# Altium PCB LAD_PCB.PcbDoc (part 1 of 2)
Units mil, origin at the board's own origin, x right, y up, seen from the top; angles counter-clockwise.
Board outline 2160 x 3165 mil, 2 copper layers (Top Layer, Bottom Layer); 66 components, 38 nets, 236 pads, 61 vias.
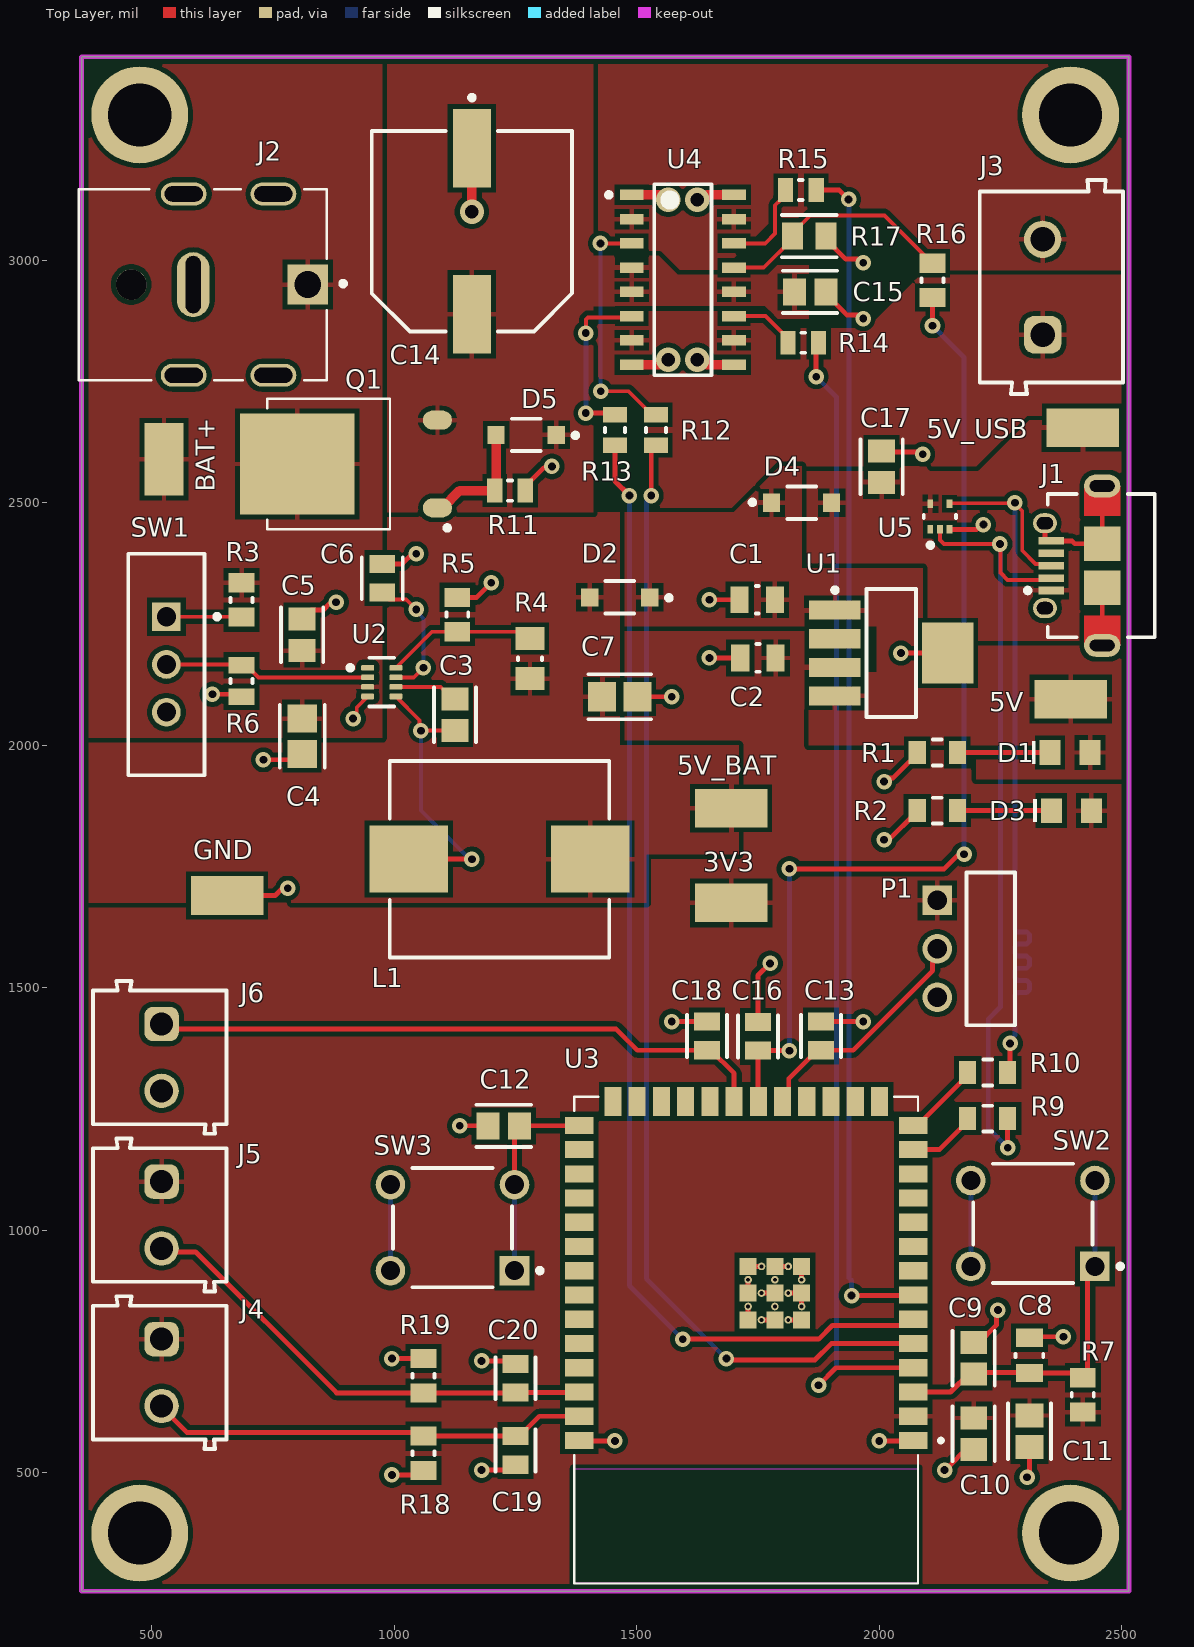
[diagram p0: Top Layer view]
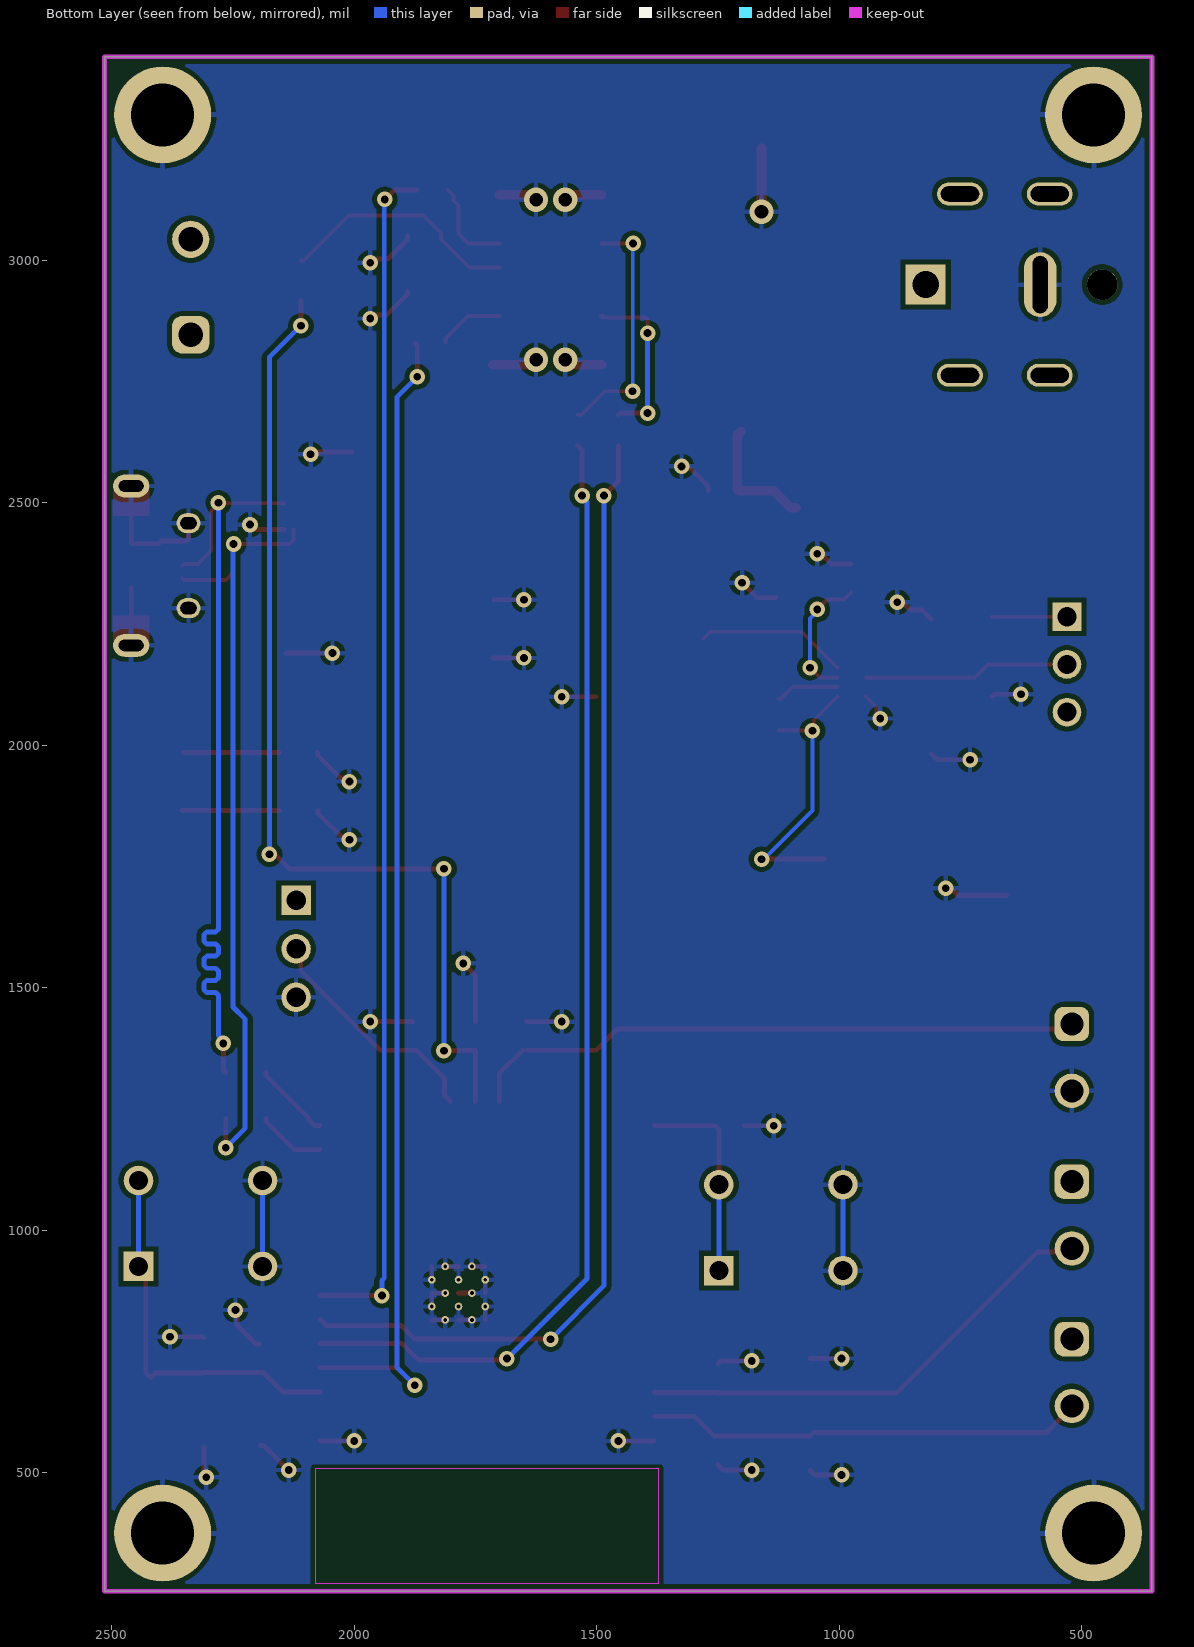
[diagram p1: Bottom Layer view, seen from below]
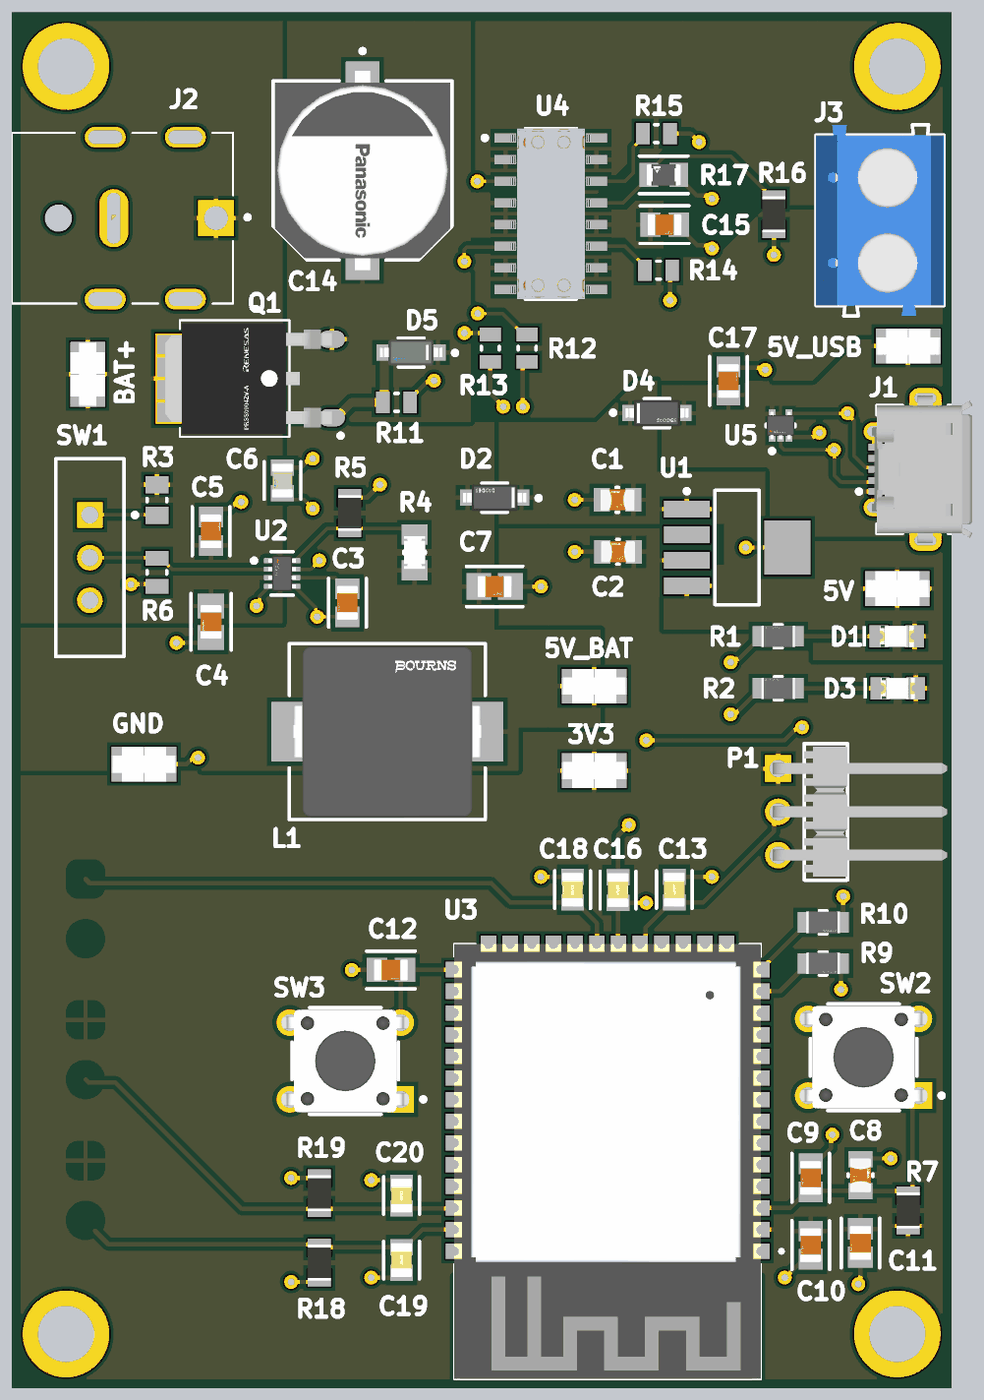
[diagram p2: 3D render of the assembled board from above, using the file's embedded part models]

## Layer stack, top to bottom
Top Solder: solder mask 0.4, Solder Resist, Dk 3.5
Top Layer: signal copper 1.4
Dielectric 1: dielectric 12.6, FR-4, Dk 4.8
Bottom Layer: signal copper 1.4
Bottom Solder: solder mask 0.4, Solder Resist, Dk 3.5

## Board outline
355,255 355,3420 2515,3420 2515,255

## Design rules (kind name [scope] priority, off if disabled: settings)
Clearance [All] p1: gap=10 ignorepadtopadclearanceinfootprint=FALSE
HoleSize [All] p1: absolutevalues=TRUE maxlimit=200 minlimit=1 maxpercent=80.000 minpercent=20.000
PolygonConnect [All] p1: connectstyle=Relief reliefconductorwidth=10 reliefentries=4 polygonreliefangle="90 Angle" airgapwidth=10
RoutingVias [All] p1: holewidth=12 width=24 viastyle="Through Hole" minholewidth=12 minwidth=24 maxholewidth=28 maxwidth=50
SolderMaskExpansion [All] p1: expansion=4 istentingtop=FALSE
Width [All] p1: maxlimit=20 minlimit=8 preferedwidth=10 minimp=50.000000 maximp=50.000000 favimp=50.000000
29 further rules are at their usual default settings.

## Classes and differential pairs
component class Power: 3V3 5V 5V_BAT 5V_USB BAT+ C1 C2 C3 C4 C5 C6 C7 D1 D2 D3 D4 GND L1 R1 R2 R3 R4 R5 R6 SW1 U1 U2
component class Motor: C14 C15 C16 D5 Q1 R11 R12 R13 R14 R15 R16 R17 U4
component class MCU: C8 C9 C10 C11 C12 C13 R7 R9 R10 SW2 SW3 U3
component class Connectors: C17 C18 C19 C20 J1 J2 J3 J4 J5 J6 P1 R18 R19 U5

## Components (designator, comment, footprint, x,y, rotation, side; value= is the part's Value field where it differs from the comment)
3V3 "" KSTN-5019_V 1695,1675 r0 top
5V "" KSTN-5019_V 2395,2095 r0 top
5V_BAT "" KSTN-5019_V 1695,1870 r0 top
5V_USB "" KSTN-5019_V 2420,2655 r180 top
BAT+ "" KSTN-5019_V 525,2590 r90 top
C1 "CC0805MKX7R7BB105" FP-CC0805-0_85-MFG 1748.58,2300 r180 top value="1 uF"
C2 "CC0805MKX7R7BB105" FP-CC0805-0_85-MFG 1750,2180 r180 top value="1 uF"
C3 "GCD21BR71H104MA01L" FP-GCD21B-0_15-IPC_B 1125,2062.47 r270 top
C4 "GRM21BR61H106KE43L" FP-GRM21B-0_2-e0_2_0_7-IPC_A 810,2018.55 r270 top
C5 "GCD21BR71H104MA01L" FP-GCD21B-0_15-IPC_B 810,2227.47 r90 top
C6 "C0805C333K5RACAUTO" FP-C0805C-DN-MFG 975,2344.53 r90 top value="33,000 pF"
C7 "GRM21BR61A476ME15L" FP-GRM21B-0_2-e0_2_0_7-IPC_A 1465,2100 r0 top
C8 "CC0805MKX7R7BB105" FP-CC0805-0_85-MFG 2310,741.42 r90 top value="1 uF"
C9 "GCD21BR71H104MA01L" FP-GCD21B-0_15-IPC_B 2195,735.47 r270 top
C10 "GCD21BR71H104MA01L" FP-GCD21B-0_15-IPC_B 2195,580 r270 top
C11 "GRT21BC71E106KE13L" FP-GRT21B-0_2-IPC_B 2310,585 r270 top
C12 "GCD21BR71H104MA01L" FP-GCD21B-0_15-IPC_B 1225.47,1215 r0 top
C13 "C0805C103K8RACAUTO" FP-C0805C103K8RACAUTO-MFG 1880,1400.47 r90 top
C14 "EEHZT1V271P" FP-EEH-G-MFG 1160,3060 r270 top
C15 "GCD21BR71H104MA01L" FP-GCD21B-0_15-IPC_B 1857.47,2935 r0 top
C16 "C0805C103K8RACAUTO" FP-C0805C103K8RACAUTO-MFG 1750,1399.53 r90 top
C17 "GCD21BR71H104MA01L" FP-GCD21B-0_15-IPC_B 2005,2574.53 r90 top
C18 "C0805C103K8RACAUTO" FP-C0805C103K8RACAUTO-MFG 1645,1400.47 r90 top
C19 "C0805C103K8RACAUTO" FP-C0805C103K8RACAUTO-MFG 1250,545.47 r270 top
C20 "C0805C103K8RACAUTO" FP-C0805C103K8RACAUTO-MFG 1250,694.53 r90 top
D1 "150080SS75000" WL-SMCW_0805_150080xx75000 2393.66,1985 r0 top
D2 "B0530W-7-F" FP-SOD123-MFG 1465,2305 r180 top value=170pF
D3 "150080VS75000" WL-SMCW_0805_150080xx75000 2396.34,1865 r0 top
D4 "B0530W-7-F" FP-SOD123-MFG 1840,2500 r0 top value=170pF
D5 "MMSZ5245B-7-F" FP-SOD123-MFG 1272.01,2640 r180 top
GND "" KSTN-5019_V 655,1690 r0 top
J1 "47589-0001" MOLX-47589-0001_V 2400.94,2370.28 r90 top
J2 "JACK-C-PC-10A-RA(R)" GLOBTECK_JACK-C-PC-10A-RA(R) 605,2950 r0 top
J3 "691102710002" 691102710002 2355,2945 r90 top
J4 "691103110002" 691103110002 50516.06,-49293.9 r270 top
J5 "691103110002" 691103110002 50516.06,-48968.9 r270 top
J6 "691103110002" 691103110002 50516.06,-48643.9 r270 top
L1 "SRP1038A-100M" FP-SRP1038A-100M-MFG 1217.01,1765 r0 top
P1 "TSW-103-08-F-S-RA" SMTC-TSW-103-08-X-S-RA 2120,1680 r270 top
Q1 "NP50P04SDG-E1-AY" DPAK230P1010X240-3_PRSS0004ZV-A_N 900,2580 r180 top
R1 "AC0805FR-07330RL" FP-AC0805-MFG 2120,1985 r180 top value=330Ω
R2 "AC0805FR-07330RL" FP-AC0805-MFG 2120,1865 r180 top value=330Ω
R3 "RC0805FR-07402KL" RESC2013X60X35NL10T20 685,2299.57 r90 top
R4 "CRCW080552K3FKEA" FP-CRCW0805-e3-IPC_A 1280,2178.63 r90 top
R5 "RC0805FR-0710KL" RESC2013X60X35NL10T20 1130,2269.49 r90 top value=10kR
R6 "SG73S2ATTD1003F" RESC2013X60X30LL20T20 685,2132.52 r90 top
R7 "RC0805FR-0710KL" RESC2013X60X35NL10T20 2420,660 r90 top value=10kR
R9 "AC0805FR-0733RL" FP-AC0805-MFG 2223.66,1230 r0 top value=33Ω
R10 "AC0805FR-0733RL" FP-AC0805-MFG 2223.66,1325 r0 top value=33Ω
R11 "AC0805JR-071KL" RESC2013X60X35LL10T20 1238.5,2525 r180 top
R12 "AC0805JR-071KL" RESC2013X60X35LL10T20 1540,2650 r90 top
R13 "AC0805JR-071KL" RESC2013X60X35LL10T20 1455,2650 r90 top
R14 "AC0805JR-071KL" RESC2013X60X35LL10T20 1843.5,2830 r180 top
R15 "AC0805JR-071KL" RESC2013X60X35LL10T20 1838.5,3145 r180 top
R16 "RC0805FR-0710KL" RESC2013X60X35NL10T20 2110,2958.66 r90 top value=10kR
R17 "CRCW0805200RFKEAHP" FP-CRCW0805-HPe3-IPC_B 1855.51,3050 r0 top
R18 "RC0805FR-0710KL" RESC2013X60X35NL10T20 1060,539.57 r270 top value=10kR
R19 "RC0805FR-0710KL" RESC2013X60X35NL10T20 1060,699.57 r90 top value=10kR
SW1 "EG1218" ESWI-EG1218_V 530,2166.57 r270 top
SW2 "TL1105AF160Q" FP-TL1105AF160Q-MFG 2317.05,1013.58 r180 top
SW3 "TL1105AF160Q" FP-TL1105AF160Q-MFG 1120,1005 r180 top
U1 "LP38693MPX-3.3/NOPB" MP05A_M 2025,2190 r0 top
U2 "TPS62932DRLR" FP-DRL0008A-MFG 974.13,2130.16 r0 top
U3 "ESP32-S3-WROOM-1" ESP32-S3-WROOM-1 1725.83,773.03 r180 top
U4 "VNH7070ASTR" FP-SO-16N-GAPGCFT00818-MFG 1595,2960 r0 top
U5 "TPD3E001DRLR" FP-DRL0005A-MFG 2125.32,2471.57 r0 top

## Footprints (in the part's own frame and the unit in brackets; to place one, negate y for a bottom-side part, rotate by r counter-clockwise, add the part's x,y. Pads: shape width x height; smd on the part's side, far side on the other; paste and mask are expansions set on the pad)
691102710002 [mm] "5,00mm - modular - blue - Horizontal entry with pressure clamp - 9,9 mm height - 02p"
  rrect50% 1.95x1.95 hole 1.3: 1(-2.5,0.45)
  round 1.95 hole 1.3: 2(2.5,0.45)
  silkscreen extent -5.6,-3.75 5.6,3.75, body extent -5.6,-3.75 5.6,3.75, height 9.96
691103110002 [mm] "3,50mm - modular - blue - Horizontal wire entry - Pressure clamp - 8,4mm height - 02p"
  rrect50% 1.8x1.8 hole 1.2: 1(-1271.75,-1269.9)
  round 1.8 hole 1.2: 2(-1268.25,-1269.9)
  silkscreen extent -1274,-1273.5 -1266,-1266.5, body extent -1274,-1273.5 -1266,-1266.5, height 8.45
DPAK230P1010X240-3_PRSS0004ZV-A_N [mm] "D-PAK, 3-Pads, Body 6.10x6.50mm (max), IPC Medium Density"
  rrect100% 1.525x1 smd: 1(-4.8,2.3) 3(-4.8,-2.3)
  rect 6x5.3 smd paste-3: 4(2.55,0)
  silkscreen extent -5.44,-3.41 4.11,3.47, body extent -4.81,-3.25 4.99,3.25, height 2.65
ESP32-S3-WROOM-1 [mm]
  rect 1.5x0.9 smd: 1(-8.75,5.26) 2(-8.75,3.99) 3(-8.75,2.72) 4(-8.75,1.45) 5(-8.75,0.18) 6(-8.75,-1.09) 7(-8.75,-2.36) 8(-8.75,-3.63) 9(-8.75,-4.9) 10(-8.75,-6.17) 11(-8.75,-7.44) 12(-8.75,-8.71) 13(-8.75,-9.98) 14(-8.75,-11.25) 27(8.75,-11.25) 28(8.75,-9.98) 29(8.75,-8.71) 30(8.75,-7.44) 31(8.75,-6.17) 32(8.75,-4.9) 33(8.75,-3.63) 34(8.75,-2.36) 35(8.75,-1.09) 36(8.75,0.18) 37(8.75,1.45) 38(8.75,2.72) 39(8.75,3.99) 40(8.75,5.26)
  rect 0.9x1.5 smd: 15(-6.985,-12.5) 16(-5.715,-12.5) 17(-4.445,-12.5) 18(-3.175,-12.5) 19(-1.905,-12.5) 20(-0.635,-12.5) 21(0.635,-12.5) 22(1.905,-12.5) 23(3.175,-12.5) 24(4.445,-12.5) 25(5.715,-12.5) 26(6.985,-12.5)
  rect 0.9x0.9 smd: 41_1(-1.5,-2.46) 41_2(-2.9,-2.46) 41_3(-0.1,-2.46) 41_4(-2.9,-3.86) 41_5(-1.5,-3.86) 41_6(-0.1,-3.86) 41_7(-2.9,-1.06) 41_8(-1.5,-1.06) 41_9(-0.1,-1.06)
  round 0.4 hole 0.2 mask+0: 41_10(-1.5,-1.76) 41_11(-2.9,-1.76) 41_12(-0.1,-1.76) 41_13(-2.9,-3.16) 41_14(-1.5,-3.16) 41_15(-0.1,-3.16) 41_16(-2.2,-1.06) 41_17(-0.8,-1.06) 41_18(-2.2,-2.46) 41_19(-0.8,-2.46) 41_20(-2.2,-3.86) 41_21(-0.8,-3.86)
  Keep-Out Layer region: 9,6.75 -9,6.75 -9,12.75 9,12.75
  Keep-Out Layer region: 9,6.75 -9,6.75 -9,12.75 9,12.75
  silkscreen extent -10.3,-12.75 9,12.75, body extent -9,-12.75 9,12.75, height 3.25
ESWI-EG1218_V [mm] "THD, 3-Leads, Body 11.6x4mm, Pitch 2.5mm"
  rect 1.5x1.5 hole 1: 1(-2.5,0)
  round 1.5 hole 1: 2(0,0) 3(2.5,0)
  silkscreen extent -5.8,-2 5.8,2.78, body extent -5.8,-2 5.8,2, height 7.4
FP-AC0805-MFG [mm]
  rect 0.9x1.2 smd paste+0 mask+0: 1(-1.05,0) 2(1.05,0)
  silkscreen extent -0.23,-0.67 0.23,0.67, body extent -1.6,-0.77 1.6,0.77, height 0.25
FP-C0805C103K8RACAUTO-MFG [mm]
  rect 0.95x1.35 smd paste+0 mask+0: 1(-0.75,0) 2(0.75,0)
  silkscreen extent -1.1,-1.05 1.1,1.05, body extent -1.4,-0.85 1.4,0.85, height 0.25
FP-C0805C-DN-MFG [mm]
  rect 0.95x1.35 smd paste+0 mask+0: 1(-0.75,0) 2(0.75,0)
  silkscreen extent -1.1,-1.07 1.1,1.07, body extent -1.4,-0.85 1.4,0.85, height 0.25
FP-CC0805-0_85-MFG [mm]
  rect 0.95x1.4 smd paste+0 mask+0: 1(-0.925,0) 2(0.925,0)
  silkscreen extent -0.08,-0.72 0.08,0.72, body extent -1.6,-1.05 1.6,1.05, height 0.25
FP-CRCW0805-e3-IPC_A [mil]
  rect 47.5x59.38 smd paste+0 mask+0: 1(-41.37,0) 2(41.37,0)
  silkscreen extent -3,-25 3,25, body extent -85,-49 85,49, height 10
FP-CRCW0805-HPe3-IPC_B [mil]
  rect 43.55x55.44 smd paste+0 mask+0: 1(-34.49,0) 2(34.49,0)
  silkscreen extent -56,-43 56,43, body extent -66,-38 66,38, height 10
FP-DRL0005A-MFG [mm]
  rect 0.3x0.45 smd paste-1000 mask-1000: 1(-0.5,-0.675) 2(0,-0.675) 3(0.5,-0.675) 4(0.5,0.675) 5(-0.5,0.675)
  silkscreen extent -0.85,-1.62 0.85,0.08, body extent -1.1,-1.05 1.1,1.05, height 0.25
FP-DRL0008A-MFG [mm]
  rrect33% 0.67x0.3 smd paste+0 mask+0: 1(-0.74,0.75) 2(-0.74,0.25) 3(-0.74,-0.25) 4(-0.74,-0.75) 5(0.74,-0.75) 6(0.74,-0.25) 7(0.74,0.25) 8(0.74,0.75)
  silkscreen extent -1.77,-1.28 0.65,1.28, body extent -1.17,-1.35 1.17,1.35, height 0.25
FP-EEH-G-MFG [mm]
  rect 4.1x2 smd paste+0 mask+0: 1(-4.35,0) 2(4.35,0)
  silkscreen extent -7.12,-5.25 5.25,5.25, body extent -6.65,-5.5 6.65,5.5, height 0.25
FP-GCD21B-0_15-IPC_B [mil]
  rect 47.47x55.44 smd paste+0 mask+0: 1(-32.53,0) 2(32.53,0)
  silkscreen extent -56,-43 56,43, body extent -66,-38 66,38, height 10
FP-GRM21B-0_2-e0_2_0_7-IPC_A [mil]
  rect 57.27x61.27 smd paste+0 mask+0: 1(-36.45,0) 2(36.45,0)
  silkscreen extent -65,-46 65,46, body extent -85,-50 85,50, height 10
FP-GRT21B-0_2-IPC_B [mil]
  rect 49.4x57.33 smd paste+0 mask+0: 1(-32.51,0) 2(32.51,0)
  silkscreen extent -57,-44 57,44, body extent -67,-39 67,39, height 10
FP-SO-16N-GAPGCFT00818-MFG [mm]
  rect 1.25x0.55 smd paste+0 mask+0: 1(-2.675,4.445) 2(-2.675,3.175) 3(-2.675,1.905) 4(-2.675,0.635) 5(-2.675,-0.635) 6(-2.675,-1.905) 7(-2.675,-3.175) 8(-2.675,-4.445) 9(2.675,-4.445) 10(2.675,-3.175) 11(2.675,-1.905) 12(2.675,-0.635) 13(2.675,0.635) 14(2.675,1.905) 15(2.675,3.175) 16(2.675,4.445)
  silkscreen extent -4,-5 1.5,5, body extent -3.4,-5.1 3.4,5.1, height 0.25
FP-SOD123-MFG [mm]
  rect 0.9x0.95 smd paste+0 mask+0: 1(-1.575,0) 2(1.575,0)
  silkscreen extent -2.7,-0.85 0.75,0.85, body extent -2.12,-0.95 2.12,0.95, height 0.25
FP-SRP1038A-100M-MFG [mm]
  rect 4.1x3.5 smd paste+0 mask+0: 1(-4.75,0) 2(4.75,0)
  silkscreen extent -5.75,-5.15 5.75,5.15, body extent -6.9,-5.25 6.9,5.25, height 0.25
FP-TL1105AF160Q-MFG [mm]
  rect 1.55x1.55 hole 1 paste-2539.97 mask+0: 1(-3.25,2.25)
  round 1.55 hole 1 paste-2539.97 mask+0: 2(3.25,2.25) 3(-3.25,-2.25) 4(3.25,-2.25)
  silkscreen extent -4.7,-3.13 3.13,3.13, body extent -4.13,-3.22 4.13,3.22, height 0.25
GLOBTECK_JACK-C-PC-10A-RA(R) [mm]
  rect 2.1x2.1 hole 1.4: 1(5.5,0)
  oval 1.7x3.4 hole 0.8 slot 3 at 90 deg: 2(-0.5,0)
  oval 2.4x1.2 hole 0.8 slot 2 at 0 deg: P1(3.7,4.75) P2(3.7,-4.75) P3(-1,4.75) P4(-1,-4.75)
  round 1.6 hole 1.6 unplated: ""(-3.75,0)
  silkscreen extent -6.5,-5 7.45,5
KSTN-5019_V [mm] "Test Point, 1-Leads, Body 3.81x2.03mm"
  rect 3.8x2.03 smd: 1(0,0)
  body extent -1.9,-1.01 1.9,1.02, height 2.29
MOLX-47589-0001_V [mm] "SMD, 5-Leads, Body 7.5x5.6mm, Pitch 0.65mm"
  rect 0.4x1.35 smd: 1(-1.3,1.175) 2(-0.65,1.175) 3(0,1.175) 4(0.65,1.175) 5(1.3,1.175)
  oval 1.05x1.25 hole 0.65 slot 0.85 at 90 deg: 6(-2.225,1.5) 7(2.225,1.5)
  oval 1.2x1.9 hole 0.6 slot 1.3 at 90 deg: 8(-4.175,-1.5) 11(4.175,-1.5)
  rect 1.8x1.9 smd: 9(-1.15,-1.5) 10(1.15,-1.5)
  Top Layer region: -2.6,-0.55 -4.175,-0.55 -4.175,-2.45 -2.6,-2.45
  Top Layer region: 2.6,-2.45 4.175,-2.45 4.175,-0.55 2.6,-0.55
  silkscreen extent -3.75,-4.25 3.75,2.52, body extent -4.32,-4.25 4.32,1.64, height 2.74
MP05A_M [mm] "SOT223, 5-Leads, Body 6.5x3.5mm, Pitch 1.5mm, Lead Span 7mm, IPC Low Density"
  rect 2.7x1 smd: 1(-2.95,2.25) 2(-2.95,0.75) 3(-2.95,-0.75) 4(-2.95,-2.25)
  rect 2.7x3.2 smd: 5(2.95,0)
  silkscreen extent -3.07,-3.35 1.3,3.42, body extent -1.86,-3.35 1.86,3.35, height 1.8
RESC2013X60X30LL20T20 [mm] "Chip Resistor, 2-Leads, Body 2.00x1.25mm, IPC High Density"
  rect 0.85x1.35 smd: 1(-0.825,0) 2(0.825,0)
  silkscreen extent -0.1,-0.58 0.1,0.58, body extent -1.1,-0.72 1.1,0.72, height 0.6
RESC2013X60X35LL10T20 [mm] "Chip Resistor, 2-Leads, Body 2.00x1.25mm, IPC High Density"
  rect 0.8x1.25 smd: 1(-0.8,0) 2(0.8,0)
  silkscreen extent -0.1,-0.53 0.1,0.53, body extent -1.05,-0.67 1.05,0.67, height 0.6
RESC2013X60X35NL10T20 [mm] "Chip Resistor, 2-Leads, Body 2.00x1.25mm, IPC Medium Density"
  rect 1x1.35 smd: 1(-0.9,0) 2(0.9,0)
  silkscreen extent -0.1,-0.58 0.1,0.58, body extent -1.05,-0.67 1.05,0.67, height 0.6
SMTC-TSW-103-08-X-S-RA [mm] ".025 SQ Post Terminal Strip Assembly, 1x3 Pins, Right Angle, 2.54mm Pitch, Male"
  rect 1.55x1.55 hole 1.02: 1(0,0)
  round 1.55 hole 1.02: 2(2.54,0) 3(5.08,0)
  silkscreen extent -1.46,1.52 6.54,4.06, body extent -1.27,-0.32 6.35,9.9, height 3.05
WL-SMCW_0805_150080xx75000 [mm] "SMD Mono-color Chip LED, body 2.0x1.25mm"
  rect 1.1x1.3 smd: 1(-1.05,0) 2(1.05,0)
  silkscreen extent -2,-0.6 -1.8,0.6, body extent -1,-0.63 1,0.62, height 0.7

## Part data
3V3 5V 5V_BAT 5V_USB BAT+ GND: library part CMP-1672-00008-1, "Test Point, 1 Position SMD, RoHS, Tape and Reel", Manufacturer="Keystone Electronics", Manufacturer Part Number=5019, Package Quantity=1000, Supplier Part Number=36-5019CT-ND, Category=Connectors, ComponentLink1Description="Manufacturer URL", ComponentLink1URL=http://www.keyelco.com/, ComponentLink2Description=Datasheet, ComponentLink2URL=http://www.keyelco.com/product-pdf.cfm?p=1357, ComponentLink3Description=https://datasheet.ciiva.com:443/pdfs/VipMasterIC/IC/KEYC/KEYC-S-A0003063693/KEYC-S-A0003063693-1.pdf?src-supplier=IHS+Markit, ComponentLink3URL=https://datasheet.ciiva.com:443/pdfs/VipMasterIC/IC/KEYC/KEYC-S-A0003063693/KEYC-S-A0003063693-1.pdf?src-supplier=IHS+Markit, ComponentLink4Description=https://datasheet.ciiva.com/16318/m60-2p61-16318395.pdf?src-supplier=Future+Electronics, ComponentLink4URL=https://datasheet.ciiva.com/16318/m60-2p61-16318395.pdf?src-supplier=Future+Electronics, ComponentLink5Description=https://datasheet.ciiva.com/14848/m60-2p61-14848438.pdf?src-supplier=Digikey, ComponentLink5URL=https://datasheet.ciiva.com/14848/m60-2p61-14848438.pdf?src-supplier=Digikey, ComponentLink6Description=https://datasheet.ciiva.com/14848/m60-2p61-14848439.pdf?src-supplier=Digikey, ComponentLink6URL=https://datasheet.ciiva.com/14848/m60-2p61-14848439.pdf?src-supplier=Digikey, ComponentLink7Description=https://datasheet.ciiva.com/14848/m60-2p61-14848437.pdf?src-supplier=Digikey, ComponentLink7URL=https://datasheet.ciiva.com/14848/m60-2p61-14848437.pdf?src-supplier=Digikey, ComponentLink8Description=https://datasheet.ciiva.com/16885/70182998-16885945.pdf?src-supplier=Allied+Electronics, ComponentLink8URL=https://datasheet.ciiva.com/16885/70182998-16885945.pdf?src-supplier=Allied+Electronics, Connector Type="Interconnection Device", Contact Plating=Silver, DatasheetVersion=03/2014, Mount="Surface Mount", Mounting Technology="Surface Mount", PackageDescription="1-Pin Surface Mount Device, Body 3.81 x 2.03 mm", PackageReference=5019, Packaging="Tape and Reel", Pins=1, Pricing="1=0.34, 25=0.2736, 100=0.2234, 250=0.20064, 500=0.19152 (USD)", Reach SVHC Compliant=Yes, RoHS=Yes, RoHS Compliant=Yes, RoHSCompliant=True, Stock=174520, Supplier=Digikey
C1 C2 C8: library part CMP-03422-001156-1, "CAP CER 1UF 16V X7R 0805", Capacitance=1uF, Manufacturer=Yageo, Package=CC0805-0.85, Temperature="-30°C to +85°C", Temperature Characteristic=X7R, Temperature Range High=+85°C, Temperature Range Low=-30°C, Tolerance=0.2, Voltage Rating="16 V", Automotive=No, Category=Cap, ComponentLink2Description=Datasheet, ComponentLink2URL=http://www.yageo.com/documents/recent/UPY-GPHC_Y5V_6.3V-to-50V_8.pdf, Device Class L1="Passive Components", Device Class L2=Capacitors, Device Class L3="Ceramic Capacitors", Digikey Description="CAP CER 1UF 16V X7R 0805", Footprint Url=http://www.yageo.com/exep/pages/download/literatures/UPY-C_GEN_24.pdf, Height=0.95mm, Ipc Land Pattern Name=CAPC200125X85, Lead Free=Yes, Manufacturer Part Number=CC0805MKX7R7BB105, Material=Ceramic, Mouser Description="Multilayer Ceramic Capacitors MLCC - SMD/SMT 1.0uF 16V X7R 20%", Octopart=https://octopart.com/cc0805mkx7r7bb105-yageo-33242308, RoHS=TRUE
C3 C5 C9 C10 C12 C15 C17: library part CMP-06035-004518-1, "Chip Multilayer Ceramic Capacitors for Automotive, 0805, 0.10uF, X7R, 15%, 20%, 50V, Grade 1", Capacitance=0.1uF
C4: library part CMP-06035-004402-1, "Chip Multilayer Ceramic Capacitors for General Purpose, 0805, 10uF, X5R, 15%, 10%, 50V", Capacitance=10uF, Dielectric=X5R, Tolerance=10%, Voltage Rating (DC)=50V, Length=2mm, Thickness=1.25mm, Width=1.25mm
C6: library part CMP-2007-01069-2, "CAP CER 0.033UF 50V X7R 0805", Capacitance=33nF, Manufacturer=KEMET, Package=C0805C-DN, Temperature="-55°C to +125°C", Temperature Characteristic=X7R, Temperature Coefficient=30ppm/°C, Temperature Range High=+125°C, Temperature Range Low=-55°C, Tolerance=0.1, Voltage Rating="50 V", Automotive=No, Category=Cap, ComponentLink2Description=Datasheet, ComponentLink2URL=https://content.kemet.com/datasheets/KEM_C1003_C0G_SMD.pdf, Device Class L1="Passive Components", Device Class L2=Capacitors, Device Class L3="Ceramic Capacitors", Digikey Description="CAP CER 0.033UF 50V X7R 0805", Height=0.88mm, Ipc Land Pattern Name=CAPC200125X78, Lead Free=Yes, Manufacturer Part Number=C0805C333K5RACAUTO, Material=Ceramic, Mouser Description="SMD Multilayer Ceramic Capacitor, AEC-Q200 C Series, 0.033 F, 10%, X7R, 50 V, 0805 [2012 Metric]", Octopart=https://octopart.com/c0805c333k5racauto-kemet-21768584, RoHS=TRUE
C7: library part CMP-2000-06341-2, "Chip Multilayer Ceramic Capacitors for General Purpose, 0805, 47uF, X5R, 15%, 20%, 10V", Capacitance=47uF, Case Code (Imperial)=0805, Case Code (Metric)=2012, Dielectric=X5R, Dielectric Material=Ceramic, Max Operating Temperature=85°C, Min Operating Temperature=-55°C, Tolerance=20%, Voltage=10V, Case/Package=0805, Depth=1.25mm, Dissipation Factor=0.035%, Height=1.25mm, Lead Free="Lead Free", Length=2mm, Mount="Surface Mount", Packaging="Tape and Reel", REACH SVHC="No SVHC", Termination=SMD/SMT, Thickness=0.057inch, Voltage Rating=10V, Voltage Rating (DC)=10V, Width=0.049inch
C11: library part CMP-06035-008164-1, "Multi-Layer Ceramic Capacitor 10uF 25V X7S ±10% 0805 Emboss T/R", Capacitance=10μF
C13 C16 C18 C19 C20: library part CMP-00212-126448506-1, "C0805C103K8RACAUTO Cap, 0.01UF, 10V, Mlcc, 0805 Rohs Compliant: Yes", Capacitance=10nF, Case/Package=0805, Dielectric=X7R, Max Operating Temperature=125°C, Min Operating Temperature=-55°C, Tolerance=10%, Voltage Rating=10V, Height=880µm, Material=Ceramic, NexarPartId=126448506, RoHS=Compliant, Voltage Rating (DC)=10V
C14: library part CMP-05428-001040-1, "Conductive Polymer Hybrid Aluminum Electrolytic Capacitors 270uF ±20% 35V RADIAL SMT 10x10.2mm", Capacitance=270uF, RoHS Compliant=Yes
D1: library part CMP-1426-00010-4, "Led, Red, 630 Nm, 1.9 V, 30 Ma, 60 Mcd Rohs Compliant: Yes", Case Code (Imperial)=0805, Case Code (Metric)=2012, Color=Red, Forward Current=100mA, Forward Voltage=1.9V, Max Junction Temperature (Tj)=95°C, Max Operating Temperature=85°C, Max Reverse Voltage (DC)=5V, Min Operating Temperature=-40°C, Power Dissipation=72mW, Test Current=20mA, Case/Package=0805, Dominant Wavelength=630nm, Height=700µm, Length=2mm, Lens Style="Clear, Rectangular", Luminous Intensity=60mcd, Mount="Surface Mount", Packaging="Tape and Reel", Peak Wavelength=645nm, REACH SVHC=Unknown, Reverse Voltage=5V, RoHS=Compliant, Viewing Angle=140°, Wavelength=630nm, Width=1.25mm
D2 D4: library part CMP-2000-05879-2, "DIODE SCHOTTKY 30V 500MA SOD123", Capacitance=170pF, Forward Current=0.5A, Manufacturer="Diodes Inc.", Max Junction Temp=+125°C, Max Repetitive Reverse Voltage=30V, Max Surge Forward Current=5.5A, Package=SOD123, Peak Reverse Current=130uA, Temperature="-65°C to +125°C", Temperature Range Low=-65°C, Automotive=No, Category=Diode, ComponentLink2Description=Datasheet, ComponentLink2URL=https://www.diodes.com/assets/Datasheets/ds30139.pdf, Device Class L1="Discrete Semiconductors", Device Class L2=Diodes, Device Class L3="Schottky Diodes", Digikey Description="DIODE SCHOTTKY 30V 500MA SOD123", Footprint Url=https://www.diodes.com/assets/Package-Files/SOD123.pdf, Height=1.45mm, Ipc Land Pattern Name=SOD365155X123-2, Lead Free=Yes, Manufacturer Part Number=B0530W-7-F, Mouser Description="Schottky Diodes & Rectifiers 30V 410mW", Octopart=https://octopart.com/b0530w-7-f-diodes+inc.-325721, Reverse Voltage=30V, RoHS=TRUE, Standoff Height=0mm, Temperature Range High=+125°C
D3: library part CMP-1426-00009-6, "WL-SMCW SMT Mono-Color Chip LED Waterclear", Case Code (Imperial)=0805, Case Code (Metric)=2012, Color=Green, Forward Current=100mA, Forward Voltage=2V, Max Junction Temperature (Tj)=95°C, Max Operating Temperature=85°C, Max Reverse Voltage (DC)=5V, Min Operating Temperature=-40°C, Power Dissipation=72mW, Test Current=20mA, Case/Package=0805, Dominant Wavelength=570nm, Height=700µm, Length=2mm, Lens Style="Clear, Rectangular", Luminous Intensity=40mcd, Mount="Surface Mount", Packaging="Tape and Reel", Peak Wavelength=572nm, REACH SVHC=Unknown, Reverse Voltage=5V, RoHS=Compliant, Viewing Angle=140°, Wavelength=570nm, Width=1.25mm
D5: library part CMP-12792-000001-1, "DIODE ZENER 15V 500MW SOD123", Manufacturer="Diodes Inc.", Max Junction Temp=+150°C, Max Reverse Leakage Current=0.1uA, Max Zener Voltage=15.75V, Nom Zener Voltage=15V, Package=SOD123, Power Dissipation=370mW, Reverse Voltage=11V, Temperature="-65°C to +150°C", Temperature Range Low=-65°C, Automotive=No, Category=Diode, ComponentLink2Description=Datasheet, ComponentLink2URL=https://www.diodes.com/assets/Datasheets/ds18010.pdf, Device Class L1="Discrete Semiconductors", Device Class L2=Diodes, Device Class L3="Zener Diodes", Digikey Description="DIODE ZENER 15V 500MW SOD123", Footprint Url=https://www.diodes.com/assets/Package-Files/SOD123.pdf, Height=1.45mm, Lead Free=Yes, Manufacturer Part Number=MMSZ5245B-7-F, Mouser Description="Zener Diodes 15V 500mW", Octopart=https://octopart.com/mmsz5245b-7-f-diodes+inc.-332054, RoHS=TRUE, Standoff Height=0mm, Temperature Range High=+150°C, Zener Impedance=16Ω
J1: library part CMP-2000-05610-1, "Right Angle Female Type AB Micro USB Connector, 30 V, 1.8 A, -30 to 85 degC, RoHS, Tape and Reel", Color=Black, Current Rating=1.8A, Manufacturer=Molex, Operating Temperature Range=-20Cto+85C, Package Description="Micro USB Connector, Pitch 0.65 mm, 5 Positions, Body 7.5 x 5.6 mm", Voltage Rating=30VAC, Brand=Molex, Connector Type=MicroUSBTypeABreceptacle, Contact Material=CopperAlloy, Contact Plating=Gold, Datasheet URL=http://www.molex.com/webdocs/datasheets/pdf/en-us/0475890001_IO_CONNECTORS.pdf, Datasheet Version=12/2016, Gender=Female, Manufacturer URL=http://www.molex.com/, Mounting Angle=Right, Mounting Technology=SurfaceMount, Number of Contacts=5Contact, Number of Ports=1Port, Package Reference=47589-0001, Package URL=http://www.molex.com/pdm_docs/sd/475890001_sd.pdf, Packaging=Reel, Product=MicroUSBTypeABConnectors, Product Category=USBConnectors, RoHS=True, Series=47589, Standard=USB, Termination Style=SMD/SMT
J2: "Power Barrel Connector Jack 2.10mm ID _0.083_, 5.50mm OD _0.217_ Through Hole, Right Angle", Package=None, Digi-Key_Part_Number=1939-1086-ND, Digi-Key_Purchase_URL=https://www.digikey.com/product-detail/en/globtek-inc/JACK-C-PC-10A-RA_R_/1939-1086-ND/8597889?utm_source=snapeda&utm_medium=aggregator&utm_campaign=symbol, MF="GlobTek, Inc.", MP=JACK-C-PC-10A-RA_R_, SnapEDA_Link=https://www.snapeda.com/parts/JACK-C-PC-10A-RA%28R%29/GlobTek%2C%20Inc./view-part/3076017/?ref=snap
J3: library part CMP-1502-03258-3, "102 Series 5MM Pitch Straight, Pcb Terminal Block, Through Hole, 2 Way", Color=Blue, Current=15A, Max Operating Temperature=105°C, Min Operating Temperature=-40°C, Voltage=300V, Contact Material=Brass, Contact Plating=Tin, Current Rating=15A, Height=13.4mm, Housing Material=Nylon, Lead Pitch=5mm, Length=7.5mm, Mount="Through Hole", Number of Contacts=2, Number of Levels=1, Number of Pins=2, Number of Positions Per Level=2, Packaging=Box, Pitch=5.0038mm, Plating=Steel, RoHS=Compliant, Stripping Length=-6mm, Termination=Screw, Voltage Rating=300V, Width=11.2mm, Wire Gauge (Max)=22AWG, Wire Gauge (Min)=14AWG, Wire/Cable Gauge=22AWG
J4 J5 J6: library part CMP-1502-03254-3, "1031 Series 3.5MM Pitch Straight, Pcb Terminal Block, Through Hole, 2 Way", Color=Blue, Current=10A, Max Operating Temperature=105°C, Min Operating Temperature=-40°C, Voltage=125V, Contact Material="Copper, Nickel, Tin, Zinc", Contact Plating=Tin, Current Rating=10A, Height=8.5mm, Housing Material=Nylon, Lead Pitch=3.5mm, Length=7mm, Mount="Through Hole", Number of Contacts=2, Number of Levels=1, Number of Pins=2, Number of Positions Per Level=2, Number of Rows=1, Packaging=Box, Pitch=3.5052mm, Plating=Steel, RoHS=Compliant, Stripping Length=-6mm, Termination=Screw, Voltage Rating=125V, Width=8mm, Wire Gauge (Max)=26AWG, Wire Gauge (Min)=16AWG, Wire/Cable Gauge=26AWG
L1: library part CMP-07248-000083-1, "FIXED IND 10UH 7.5A 30 MOHM SMD", Case/Package=Nonstandard, Current Rating=7.5A, DC Resistance (DCR)=30mR, Inductance=10uH, Inductance Tolerance=20%, Max Operating Temperature=150°C, Min Operating Temperature=-40°C, Package Quantity=500, Ratings=AEC-Q200, Resistor Type=Wirewound, Saturation Current=12A, Self Resonant Frequency=10MHz, Test Frequency=100kHz, Core Material="Carbonyl Powder", DC Current=7.5A, Depth=10.3mm, Height=3.8mm, Height - Seated (Max)=0.157inch, Length=11mm, Max DC Current=7.5A, Military Standard=Not, Mount="Surface Mount", Packaging="Tape and Reel", Q Factor=20, REACH SVHC="No SVHC", RMS Current (Irms)=7.5A, RoHS Compliant=Yes, Shielding=Shielded, Termination=SMD/SMT, Tolerance=20%, Width=0.394inch
P1: library part CMP-1024-00344-1, "0.025\" SQ Post Header, Through-hole, Right Angle, -55 to 125 degC, 2.54 mm Pitch, 3-Pin, Male, RoHS", Manufacturer=Samtec, Temperature Range="-55 to 125 degC", ComponentLink1Description="Manufacturer URL", ComponentLink1URL=http://www.samtec.com, ComponentLink2Description=Datasheet, ComponentLink2URL=http://www.samtec.com/documents/webfiles/pdf/TSW_TH.PDF, ComponentLink3Description="Package Specification", ComponentLink3URL=http://www.samtec.com/documents/webfiles/cpdf/TSW-XXX-XX-XXX-X-XX-XXX-MKT.pdf, DatasheetVersion=F-214, Mounting Technology=Through-hole, Orientation="Right Angle", PackageDescription=".025[0.64] SQ. Post Terminal Strip Assembly", PackageReference=TSW-103-08-X-S-RA, PackageVersion="DM, 8/1988", PartNumber=TSW-103-08-F-S-RA, Pitch="2.54 mm", RoHS=True
Q1: library part CMP-00572-18642745-1, "Mosfet, P -Ch, 40V, 50A, To-252 Rohs Compliant: Yes", Case/Package=TO-252, Continuous Drain Current (ID)=-50A, Drain to Source Resistance=9.6MΩ, Drain to Source Voltage (Vdss)=-40V, Gate to Source Voltage (Vgs)=-20V, Input Capacitance=5nF, Manufacturer Lifecycle Status=ACTIVE, Max Junction Temperature (Tj)=175°C, Max Power Dissipation=1.2W, Min Operating Temperature=-55°C, China RoHS=Compliant, ComponentLink1Description="Manufacturer's Website", ComponentLink1URL=http://www.renesas.com, ComponentLink2Description="Datasheet URL", ComponentLink2URL=https://octopart.com/cad-content/api/get-model-datasheet/15189/18642745, ComponentLink3Description="Manufacturer's Package Drawing", ComponentLink3URL=https://www.renesas.com/en/document/psc/package-drawing-mp-3zk-3pin-prss0004zv, Export Control Classification Number (ECCN) Code=EAR99, Fall Time=180ns, Harmonized Tariff Schedule (HTS) Code=8541.21.0095, Height=2.4mm, HelpURL=https://octopart.com/cad-content/api/get-model-datasheet/15189/18642745, Lead Free="Lead Free", Length=6mm, Lifecycle Status=Production, Max Operating Temperature=175°C, Mount="Surface Mount", MSL=1, Number of Elements=1, Number of Pins=3, Part Family=NP50P04SDG, Power Dissipation=1.2W, Radiation Hardening=No, Rds On Max=9.6mΩ, Rise Time=13ns, RoHS=Compliant, Turn-Off Delay Time=405ns, Turn-On Delay Time=13ns, Width=6mm
R1 R2: library part CMP-03412-037341-1, "RES SMD 330 OHM 1% 1/8W 0805", Manufacturer=Yageo, Package=AC0805, Power Rating=1/8W, Resistance=330Ω, Temperature="-55°C to +155°C", Temperature Range High=+155°C, Temperature Range Low=-55°C, Tolerance=0.01, Voltage Rating=150V, Automotive=Yes, Automotive Grade="Grade 0", Category=Res, ComponentLink2Description=Datasheet, ComponentLink2URL=http://www.yageo.com/documents/recent/PYu-AC_51_RoHS_L_6.pdf, Composition="Thick Film", Device Class L1="Passive Components", Device Class L2=Resistors, Device Class L3="Chip SMD Resistors", Digikey Description="RES SMD 330 OHM 1% 1/8W 0805", Footprint Url=http://www.yageo.com/exep/pages/download/literatures/PYu-R_Mount_10.pdf, Height=0.6mm, Ipc Land Pattern Name=RESC200125X50, Lead Free=Yes, Manufacturer Part Number=AC0805FR-07330RL, Mouser Description="Thick Film Resistors - SMD 1/8W 330ohm 1% AEC-Q200", Octopart=https://octopart.com/ac0805fr-07330rl-yageo-51059920, RoHS=TRUE, Series=AC
R3: library part CMP-2001-01136-1, Manufacturer=Yageo, Resistance=402kR, Part Number=RC0805FR-07402KL
R4: library part CMP-1013-00705-3, "RES Thick Film, 52.3kΩ, 1%, 0.125W, 100ppm/°C, 0805", Case Code (Imperial)=0805, Case Code (Metric)=2012, Max Operating Temperature=155°C, Max Power Dissipation=125mW, Min Operating Temperature=-55°C, Package Quantity=10, Resistance=52.3kR, Temperature Coefficient=100ppm/°C, Tolerance=1%, Voltage Rating=150V, Case/Package=0805, Composition="Thick Film", Contact Plating=Tin, Depth=1.25mm, Features="Automotive AEC-Q200", Height=0.45mm, Lead Free="Lead Free", Length=2mm, Military Standard=Not, Number of Pins=2, Number of Terminations=2, Packaging="Tape and Reel", Power Rating=125mW, Radiation Hardening=No, Termination=Solder, Voltage Rating (DC)=150V, Weight=0.000194oz, Width=0.049inch
R5 R7 R16 R18 R19: library part CMP-1659-00013-4, "Chip Resistor, 10 KOhm, +/- 1%, 0.125 W, -55 to 155 degC, 0805 (2012 Metric), RoHS, Tape and Reel", Case/Package=0805, Manufacturer=Yageo, Max Operating Temperature="155 degC", Min Operating Temperature="-55 degC", Package Height=0.5mm, Package Length=2mm, Package Quantity=5000, Package Shape=Rectangular, Package Style=SMTMeter, Package Width=1.25mm, Power=125mW, Rated Temperature=70°C, Resistor Type="FIXED RESISTOR", Supplier Part Number=311-10.0KCRCT-ND, Temperature Coefficient=100ppm/°C, Tolerance=1%, Voltage Rating="150 V", Working Voltage=150V, Additional Feature="LASER TRIMMABLE", Category="Chip SMD Resistors", ComponentLink1Description="Manufacturer URL", ComponentLink1URL=http://www.yageo.com/, ComponentLink2Description=Datasheet, ComponentLink2URL=http://www.yageo.com/documents/recent/PYu-RC_Group_51_RoHS_L_04.pdf, ComponentLink3Description=https://datasheet.ciiva.com:443/pdfs/VipMasterIC/IC/YAGO/YAGO-S-A0008145938/YAGO-S-A0008145938-1.pdf?src-supplier=IHS+Markit, ComponentLink3URL=https://datasheet.ciiva.com:443/pdfs/VipMasterIC/IC/YAGO/YAGO-S-A0008145938/YAGO-S-A0008145938-1.pdf?src-supplier=IHS+Markit, ComponentLink4Description=https://datasheet.ciiva.com/11808/0900766b8106beab-11808151.pdf?src-supplier=Rs, ComponentLink4URL=https://datasheet.ciiva.com/11808/0900766b8106beab-11808151.pdf?src-supplier=Rs, ComponentLink5Description=https://datasheet.ciiva.com/46447/444164-46447563.pdf?src-supplier=Element14, ComponentLink5URL=https://datasheet.ciiva.com/46447/444164-46447563.pdf?src-supplier=Element14, ComponentLink6Description=https://datasheet.ciiva.com/2456/pyu-r-int-thick-7-2456973.pdf?src-supplier=Digikey, ComponentLink6URL=https://datasheet.ciiva.com/2456/pyu-r-int-thick-7-2456973.pdf?src-supplier=Digikey, ComponentLink7Description=https://datasheet.ciiva.com/2456/pyu-r-int-thick-7-2456974.pdf?src-supplier=Digikey, ComponentLink7URL=https://datasheet.ciiva.com/2456/pyu-r-int-thick-7-2456974.pdf?src-supplier=Digikey, ComponentLink8Description=https://datasheet.ciiva.com/2456/pyu-r-int-thick-7-2456972.pdf?src-supplier=Digikey, ComponentLink8URL=https://datasheet.ciiva.com/2456/pyu-r-int-thick-7-2456972.pdf?src-supplier=Digikey, ComponentLink9Description=https://datasheet.ciiva.com/12669/rc0805-12669688.pdf?src-supplier=Mouser, ComponentLink9URL=https://datasheet.ciiva.com/12669/rc0805-12669688.pdf?src-supplier=Mouser, ComponentLink10Description=https://datasheet.ciiva.com/16747/rc0805-16747087.pdf?src-supplier=Future+Electronics, ComponentLink10URL=https://datasheet.ciiva.com/16747/rc0805-16747087.pdf?src-supplier=Future+Electronics, Construction=Chip, DatasheetVersion="Rev. 4, 02/2016", Height="0.5 mm", JESD-609 Code=e3, Length="2 mm", Manufacturer Part Number=RC0805FR-0710KL, Mount="Surface Mount", Mounting Technology="Surface Mount", PackageDescription="2-Pin Surface Mounted Device, Body 2 x 1.25 mm", PackageReference=0805, Packaging="Tape and Reel", Pins=2, Pricing="1=0.1, 10=0.027, 50=0.017, 100=0.0142, 500=0.00976, 1000=0.00844 (USD)", REACH SVHC="No SVHC", Reach SVHC Compliant=Yes, RoHS=Yes, RoHS Compliant=Yes, RoHSCompliant=true, Stock=4430741, Supplier=Digikey, Technology="METAL GLAZE/THICK FILM", Terminal Finish=Nickel, Termination=Wraparound
R6: library part CMP-2001-02684-1, Manufacturer="KOA Speer", Resistance=100kR, Part Number=SG73S2ATTD1003F
R9 R10: library part CMP-03412-037241-1, "RES SMD 33 OHM 1% 1/8W 0805", Manufacturer=Yageo, Package=AC0805, Power Rating=1/8W, Resistance=33Ω, Temperature="-55°C to +155°C", Temperature Range High=+155°C, Temperature Range Low=-55°C, Tolerance=0.01, Voltage Rating=150V, Automotive=Yes, Automotive Grade="Grade 0", Category=Res, ComponentLink2Description=Datasheet, ComponentLink2URL=http://www.yageo.com/documents/recent/PYu-AC_51_RoHS_L_6.pdf, Composition="Thick Film", Device Class L1="Passive Components", Device Class L2=Resistors, Device Class L3="Chip SMD Resistors", Digikey Description="RES SMD 33 OHM 1% 1/8W 0805", Footprint Url=http://www.yageo.com/exep/pages/download/literatures/PYu-R_Mount_10.pdf, Height=0.6mm, Ipc Land Pattern Name=RESC200125X50, Lead Free=Yes, Manufacturer Part Number=AC0805FR-0733RL, Mouser Description="Thick Film Resistors - SMD 1/8W 33ohm 1% AEC-Q200", Octopart=https://octopart.com/ac0805fr-0733rl-yageo-46503501, RoHS=TRUE, Series=AC
R11 R12 R13 R14 R15: library part CMP-2001-04511-1, Manufacturer=Yageo, Resistance=1kR, Part Number=AC0805JR-071KL
R17: library part CMP-02407-008327-1, "RES Thick Film, 200Ω, 1%, 0.5W, 100ppm/°C, 0805", Case/Package=0805, Max Operating Temperature=155°C, Max Power Dissipation=500mW, Min Operating Temperature=-55°C, Package Quantity=5000, Resistance=200R, Temperature Coefficient=100ppm/°C, Tolerance=1%, Composition="Thick Film", Contact Plating=Tin, Depth=1.25mm, Features="Automotive AEC-Q200", Height=0.024inch, Lead Free="Lead Free", Length=2mm, Military Standard=Not, Mount="Surface Mount", Number of Terminations=2, Packaging="Tape and Reel", Radiation Hardening=No, Width=0.049inch
SW1: library part CMP-1696-00002-1, "Slide Switch, 500 V, -20 to 70 degC, 3-Pin THD, RoHS", Case\Package=SOT-23-5, Dropout Voltage="300 mV", Max Input Voltage="8 V", Max Operating Temperature="85 degC", Max Ouput Current="150 mA", Max Power Dissipation="250 mW", Min Input Voltage="4.3 V", Min Operating Temperature="-40 degC", Nominal Output Voltage="3.3 V", Package Quantity=3000, ComponentLink1Description="Manufacturer URL", ComponentLink1URL=http://www.e-switch.ch/en/, ComponentLink2Description=Datasheet, ComponentLink2URL=https://www.e-switch.com/system/asset/product_line/data_sheet/119/EG.pdf, DatasheetVersion=Oct-15, Height="1.3 mm", Length="3 mm", Mount="Surface Mount", Output Current="150 mA", Output Voltage="3.3 V", Outputs=1, PackageDescription="3-Pin Through Hole Device, Body 11.6 x 4 mm, Pitch 2.5 mm", PackageReference=EG1218, Packaging="Tape and Reel", Pins=5, Power Rating="250 mW", Radiation Hardening=No, REACH SVHC="No SVHC", RoHSCompliant=true, Width="1.8 mm"
SW2 SW3: library part CMP-17879-000016-1, "SWITCH TACTILE SPST-NO 0.05A 12V", Color=Black, Contact Current Rating=50mA, Contact Resistance=100mR, Max Operating Temperature=70°C, Max Voltage Rating (DC)=50V, Min Operating Temperature=-20°C, Operating Force=160gf, Package Quantity=750, Voltage Rating (DC)=12V, Actuator Length=1.4mm, Actuator Material=Nylon, Actuator Type=Standard, Contact Material=Bronze, Contact Plating=Silver, Current Rating=50mA, Electrical Life=100000Cycles, Housing Material=Nylon, Illumination Type=Non-Illuminated, Lead Free="Lead Free", Length=6mm, Mechanical Life=100000Cycles, Mount="Through Hole", Orientation=Straight, Packaging=Bulk, Reach SVHC Compliant=Yes, RoHS Compliant=Yes, Series=TL1105, Size=6mm, Switch Function=Off-Mom, Switch Travel=0.25mm, Termination="PC Pin", Throw Configuration=SPST, Width=6mm
U1: library part CMP-0062-02672-1, "500mA Low Dropout CMOS Linear Regulators Stable with Ceramic Output Capacitors, 5-pin SOT-223, 2000 Reel", Manufacturer="National Semiconductor", PowerWise=Y, Code_IPC=SOT223-5, Code_JEDEC=TO-261-AB, ComponentLink1Description="Manufacturer URL", ComponentLink1URL=http://www.national.com/, ComponentLink2Description="LP38693 Datasheet", ComponentLink2URL=http://www.national.com/ds/LP/LP38691.pdf, ComponentLink3Description="LP38693 Web Page", ComponentLink3URL=http://www.national.com/pf/LP/LP38693.html, ComponentLink4Description="MP05A Package Page", ComponentLink4URL=http://www.national.com/packaging/folders/mp05a.html, CompType="LDO IC", DatasheetVersion=Jun-2011, High-Reliability=Y, PackageDescription="Moldec SOT-223, 6.50 x 3.56 x 1.6mm Body, 5 Lead, 1.5mm Pitch", PackageReference=MP05A, PackageVersion="revA, Jan-2000", PartNumber=LP38693MPX-3.3/NOPB, PinCount=5, RoHS=Y
U2: library part CMP-04918-000714-1, "3.8-V TO 30-V INPUT, 2-A, 200-KH"
U3: Package=None, Supplier Part Number 1=5407-ESP32-S3-WROOM-1-N8CT-ND, Availability=Unavailable, MF="{'manufacturer': u'Espressif Systems'}", MP=ESP32-S3-WROOM-1-N8, Price=None, Supplier 1=DigiKey
U4: library part CMP-2000-07519-2, "IC MOTOR DRIVER 4V-28V 16SOIC", Manufacturer=STMicroelectronics, Max Junction Temp=+150°C, Max Supply Voltage=28V, Min Supply Voltage=4V, Nominal Supply Current=2-3.5mA, Output Current=15A, Package=SO-16N-GAPGCFT00818, Temperature="-40°C to +150°C", Temperature Range Low=-40°C, Automotive=Yes, Automotive Grade="Grade 0", Category=IC, ComponentLink2Description=Datasheet, ComponentLink2URL=https://www.st.com/resource/en/datasheet/vnh7070as.pdf, Device Class L1="Integrated Circuits (ICs)", Device Class L2="Power Management ICs", Device Class L3="Motor Drivers", Digikey Description="IC MOTOR DRIVER 4V-28V 16SOIC", Footprint Url=https://www.st.com/resource/en/datasheet/l6566a.pdf, Height=1.75mm, Ipc Land Pattern Name=SOIC127P600X175-16, Lead Free=Yes, Manufacturer Part Number=VNH7070ASTR, Motor Type=Brushed, Mouser Description="STMicroelectronics VNH7070ASTR Motor Driver IC 16-Pin, SOIC", Number of Outputs=2, Octopart=https://octopart.com/vnh7070astr-stmicroelectronics-66668687, RoHS=TRUE, Standoff Height=0.1mm, Temperature Range High=+150°C
U5: library part CMP-0326-00052-4, "TVS DIODE 5.5V SOT5", Breakdown Voltage=11V, Capacitance=1.5pF, Case/Package=SOT-553, Clamping Voltage=105.5V, Leakage Current=1nA, Max Operating Temperature=85°C, Max Supply Current=100nA, Max Supply Voltage=5.5V, Min Operating Temperature=-40°C, Min Supply Voltage=900mV, Package Quantity=1, Peak Pulse Power=90W, Power Line Protection=Yes, Depth=1.2mm, Direction=Unidirectional, Height=0.55mm, Interface=USB, Lead Free="Lead Free", Length=1.6mm, Max Supply Voltage (DC)=5.5V, Min Breakdown Voltage=11V, Min Supply Voltage (DC)=900mV, Nominal Supply Current=1nA, Number of Bidirectional Channels=3, Number of Channels=3, Number of Pins=5, Packaging="Tape and Reel", Radiation Hardening=No, REACH SVHC="No SVHC", Reverse Standoff Voltage=5.5V, RoHS Compliant=Yes, Termination=SMD/SMT, Weight=9.9E-05oz, Width=1.2mm

## Free pads (board coordinates)
  round 200 hole 130: 8(2395,3300) 9(475,375) 10(2395,375) 11(475,3300)

## Via types
v1: diameter 32, hole 16, Top Layer to Bottom Layer, 56 vias
v2: diameter 50, hole 28, Top Layer to Bottom Layer, 5 vias

## Nets (pads, with @x,y where several pads share a name; then routed paths per layer and width w, separated by ;. In a path a pad name is that pad's centre, name@x,y a point inside that pad or via, vN(x,y) a via of type N, cw(c..) or ccw(c..) an arc to the next point about the centre after c; other vN are vias at no path point)
3V3: 3V3.1 C2.1 C10.1 C11.1 D3.2 J4.1 J5.1 P1.1 R7.1 U1.3 U3.2
5V: 5V.1 C1.1 D1.2 D2.1 D4.1 U1.1 U1.4
5V_BAT: 5V_BAT.1 C7.1 D2.2 L1.2 R4.1
5V_USB: 5V_USB.1 C17.1 D4.2 J1.1 U5.5
AXIS_POT: C13.1 P1.2 U3.19 | length 490.4
  Top Layer w10: U3.19 1813.54,1277.87 1813.54,1312.36 1872.13,1370.94 C13.1 1946.13,1370.94 2110.24,1535.05 2110.24,1570.24 P1.2
BAT+: BAT+.1 C4.1 C5.1 J2.1 Q1.4 R3.2 U2.3
EMG_SIG: C18.1 J6.1 U3.21 | length 1273
  Top Layer w10: J6.1 530,1415 1456.97,1415 1501.03,1370.94 C18.1 ; C18.1@1652.87,1370.94 1700.83,1322.99 U3.21
GND: C1.2 C2.2 C4.2 C5.2 C6.2 C7.2 C8.2 C9.1 C10.2 C11.2 C12.1 C13.2 C14.1 C15.2 C16.2 C17.2 C18.2 C19.2 C20.2 GND.1 J1.5 J1.6 J1.7 J1.8 J1.9 J1.10 J1.11 J2.2 J6.2 P1.3 pad.8 pad.9 pad.10 pad.11 R1.2 R2.2 R5.2 R6.1 R11.1 R17.2 R18.2 R19.2 SW2.2 SW2.4 SW3.2 SW3.4 U1.5 U2.4 U3.1 U3.40 U3.41_1 U3.41_2 U3.41_3 U3.41_4 U3.41_5 U3.41_6 U3.41_7 U3.41_8 U3.41_9 U3.41_10 U3.41_11 U3.41_12 U3.41_13 U3.41_14 U3.41_15 U3.41_16 U3.41_17 U3.41_18 U3.41_19 U3.41_20 U3.41_21 U4.1 U4.8 U4.9 U4.16 U5.3 | length 4085.4
  Top Layer w8: v1(915,2055) 922.65,2062.65 922.65,2078.28 U2.4
  Top Layer w10: v1(625,2105) 680.04,2105 R6.1 ; GND.1 754.18,1690 769.18,1705 v1(780,1705) ; v1(730,1970) 797.9,1970 C4.2 ; C5.2 828.73,2278.73 852.91,2278.73 869.18,2295 v1(880,2295) ; C6.2 1016.57,2374.06 1037.52,2395 v1(1045,2395) ; v1(995,495) 1050.87,495 R18.2 ; v1(995,735) R19.2 ; R5.2@1130,2305 1170,2305 v1(1200,2335) ; v1(1135,1215) C12.1@1195.94,1215 ; v1(1180,505) 1239.06,505 C19.2 ; v1(1180,730) 1244.06,730 C20.2 ; R11.1 1270,2533.86 1308.46,2572.32 1322.32,2572.32 v1(1325,2575) ; U3.40 1382.28,565 v1(1455,565) ; C7.2 v1(1572,2100) ; v1(1572,1430) C18.2 ; v1(1650,2180) C2.2 ; v1(1650,2300) C1.2 ; U3.41_9 U3.41_12 ; U3.41_3 U3.41_15 ; U3.41_6 U3.41_21 ; C16.2 1750,1525 v1(1775,1550) ; U3.41_17 U3.41_8 ; U3.41_19 U3.41_1 ; U3.41_5 U3.41_20 ; U3.41_16 U3.41_7 ; U3.41_18 U3.41_2 U3.41_11 ; U3.41_13 U3.41_4 ; C13.2 v1(1967,1430) ; C15.2 1890,2931.01 1933.36,2887.65 1955.56,2887.65 1963.21,2880 v1(1967,2880) ; R17.2 1890,3044.05 1931.4,3002.65 1955.56,3002.65 1963.21,2995 v1(1967,2995) ; v1(2000,565) 2069.37,565 U3.1 ; C17.2@2004.06,2605 2081.21,2605 2086.21,2600 v1(2090,2600) ; v1(2010,1805) 2020,1805 2075,1860 R2.2@2075,1865 ; v1(2010,1925) 2017.65,1932.65 2028.76,1932.65 2076.1,1980 R1.2@2076.1,1985 ; v1(2045,2190) U1.5 ; v1(2135,505) 2136.18,505 2187.13,555.94 C10.2@2195,555.94 ; U5.3 2201.21,2445 2211.21,2455 v1(2215,2455) ; C9.1@2195,765 2202.87,765 2241.87,804 2241.87,831.87 v1(2245,835) ; v1(2305,490) 2305,493.79 2310,498.79 C11.2 ; C8.2 2312.17,780 v1(2380,780) ; J1.7 2341.89,2424.33 2344.76,2421.46 J1.5 2397.62,2421.46 2403.52,2415.55 J1.10 J1.11 ; J1.8 J1.9
  Top Layer w20: v2(1160,3100) C14.1 ; U4.8 1545.26,2785 1555.26,2795 v2(1565,2795) ; U4.1 1545.26,3135 1555.26,3125 v2(1565,3125) ; v2(1625,2795) 1634.74,2795 1644.74,2785 U4.9@1714.09,2785 ; v2(1625,3125) 1634.74,3125 1644.74,3135 U4.16
  Bottom Layer w10: SW3.2 SW3.4 ; SW2.2 SW2.4
MOTOR_CCW: R13.1 U3.6 | length 2393.8
  Top Layer w10: R13.1 1455,2545 v1(1485,2515) ; v1(1595,775) 1875,775 1903.23,803.23 2057.6,803.23 U3.6
  Bottom Layer w10: v1(1485,2515) 1485,885 v1(1595,775)
MOTOR_CS: C16.1 R16.1 U3.20 | length 2086.9
  Top Layer w10: U3.20 1750,1265.98 C16.1 v1(1815,1370) ; v1(1815,1745) 2134.18,1745 2164.18,1775 v1(2175,1775) ; v1(2110,2865) R16.1@2110,2917.32
  Bottom Layer w10: v1(1815,1370) v1(1815,1745) ; v1(2110,2865) 2175,2800 v1(2175,1775)
MOTOR_CW: R12.1 U3.5 | length 2360.5
  Top Layer w10: v1(1530,2515) 1530,2608.5 R12.1 ; v1(1685,735) 1687.68,732.32 1867.65,732.32 1901.28,765.94 U3.5
  Bottom Layer w10: v1(1530,2515) 1530,2512.14 1520,2502.14 1520,900 v1(1685,735)
MOTOR_NEG: J3.1 U4.7 U4.10
MOTOR_POS: J3.2 U4.2 U4.15
MOTOR_PWM: R14.1 U3.4 | length 2395
  Top Layer w10: v1(1870,2760) 1870,2825 R14.1 ; v1(1875,680) 1910.94,715.94 U3.4
  Bottom Layer w10: v1(1870,2760) 1912,2718 1912,717 v1(1875,680)
MOTOR_SEL: R15.1 U3.7 | length 2465.8
  Top Layer w10: R15.1 1917.62,3145 v1(1937,3125.62) ; v1(1943,865) 2069.37,865 U3.7
  Bottom Layer w10: v1(1937,3125.62) 1938,3124.62 1938,901 1943,896 v1(1943,865)
NetC3_1: C3.1 U2.6 | length 132.2
  Top Layer w8: U2.6 1095.7,2120.32 1121.01,2095 C3.1
NetC3_2: C3.2 L1.1 U2.5 | length 603.5
  Top Layer w8: U2.5 1052.32,2051.58 1052.32,2032.68 v1(1055,2030) 1124.94,2030 C3.2
  Top Layer w10: L1.1 v1(1160,1765)
  Bottom Layer w8: v1(1055,2030) 1055,1865 1155,1765 v1(1160,1765)
NetC6_1: C6.1 U2.7 | length 275.7
  Top Layer w8: C6.1 989.7,2300.3 1024.7,2300.3 v1(1045,2280) ; U2.7 1040,2140 v1(1060,2160)
  Bottom Layer w8: v1(1045,2280) 1045,2276.06 1060,2261.06 v1(1060,2160)
NetC8_1: C8.1 C9.2 R7.2 SW2.1 SW2.3 U3.3 | length 787.5
  Top Layer w10: U3.3 2147.13,665.94 2187.13,705.94 2195,705.94 2309.06,705.94 C8.1 2410.87,705 R7.2@2420,695.87 ; R7.2 2430,705.43 2430,910 SW2.1
  Bottom Layer w10: SW2.1 SW2.3
NetC12_2: C12.2 SW3.1 SW3.3 U3.27 | length 428.2
  Top Layer w10: SW3.3 1247.95,1207.95 1255,1215 1380.39,1215 U3.27
  Bottom Layer w10: SW3.1 SW3.3
NetD1_1: D1.1 R1.1 | length 197.3
  Top Layer w10: R1.1@2155,1985 D1.1
NetD3_1: D3.1 R2.1 | length 201.1
  Top Layer w10: R2.1@2153.9,1865 D3.1
NetD5_2: D5.2 Q1.1 R11.2 | length 258.9
  Top Layer w20: Q1.1 1099.31,2489.45 1134.86,2525 R11.2 1210,2527.99 D5.2 D5.2@1203,2647
NetR3_1: R3.1 SW1.1 | length 155.4
  Top Layer w8: SW1.1 684.13,2265 R3.1
NetR4_2: R4.2 R5.1 U2.8 | length 313.3
  Top Layer w8: U2.8 1077.56,2233.98 1130,2233.98 1266.02,2233.98 R4.2
NetR6_2: R6.2 SW1.2 U2.2 | length 426
  Top Layer w8: SW1.2 693.27,2166.57 719.84,2140 U2.2
NetR9_1: R9.1 U3.13 | length 142
  Top Layer w10: U3.13 2124.17,1165.94 2182.32,1224.09 R9.1
NetR10_1: R10.1 U3.14 | length 162.4
  Top Layer w10: U3.14 2082.13,1215.94 2094.84,1228.66 2094.84,1231.61 2182.32,1319.09 R10.1
NetR12_2: R12.2 U4.3 | length 504.2
  Top Layer w8: v1(1425,3035) U4.3 ; v1(1426,2730) 1482.64,2730 1531.14,2681.5 R12.2
  Bottom Layer w8: v1(1425,3035) 1425.5,3034.5 1425.5,2730.5 v1(1426,2730)
NetR13_2: R13.2 U4.6 | length 354
  Top Layer w8: v1(1395,2850) 1395,2877.81 1399.69,2882.5 1482.18,2882.5 1484.68,2885 U4.6@1487.18,2882.5
  Top Layer w10: v1(1395,2685) 1451.5,2685 R13.2 ; U4.6@1487.18,2882.5 U4.6
  Bottom Layer w10: v1(1395,2685) v1(1395,2850)
NetR14_2: R14.2 U4.11 | length 139.7
  Top Layer w8: U4.11 1765.87,2885 1812.01,2838.86 R14.2
NetR15_2: R15.2 U4.14 | length 192.1
  Top Layer w8: U4.14 1765,3035 1785.24,3055.24 1785.24,3113.65 1795.26,3123.67 1795.26,3133.25 R15.2
NetR16_2: R16.2 R17.1 U4.13 | length 499.7
  Top Layer w8: U4.13 1761.97,2985 1821.02,3044.05 R17.1 1821.02,3055.95 1857.79,3092.72 2011.37,3092.72 2104.09,3000 R16.2@2110,3000
PRESSURE_PAD_1: C19.1 J4.2 R18.1 U3.39 | length 871.8
  Top Layer w10: J4.2@542.14,612.86 572.64,582.36 1052.64,582.36 R18.1 C19.1 1257.87,575 1298.82,615.94 U3.39
PRESSURE_PAD_2: C20.1 J5.2 R19.1 U3.38 | length 985.6
  Top Layer w10: J5.2 527.2,955 590,955 880.87,664.13 R19.1 1249.13,664.13 C20.1 1380.39,665 U3.38
USB_DM: J1.2 R9.2 U5.2 | length 1653.5
  Top Layer w8: U5.2 2125.32,2423.54 2133.86,2415 2250,2415 2250,2355.89 2264.92,2340.97 2350.97,2340.97 J1.2
  Top Layer w10: v1(2265,1170) R9.2
  Bottom Layer w10: v1(2249,2415) 2250,2414 2250,1460 2225,1435 2225,1210 v1(2265,1170)
USB_DP: J1.3 R10.2 U5.4 | length 1633.2
  Top Layer w8: U5.4 2145.93,2499.07 2279.07,2499.07 v1(2280,2500) 2280,2498.31 2295,2483.31 2295,2401.3 2322.31,2373.99 2350.97,2373.99 J1.3
  Top Layer w10: R10.2 2270,1330 v1(2270,1385)
  Bottom Layer w10: v1(2270,1385) 2270,1390.95 2280,1400.95 2280,1484.14 2285.86,1490 2304.14,1490 2310,1495.86 2310,1509.14 2304.14,1515 2285.86,1515 2280,1520.86 2280,1534.14 2285.86,1540 2304.14,1540 2310,1545.86 2310,1559.14 2304.14,1565 2285.86,1565 2280,1570.86 2280,1584.14 2285.86,1590 2304.14,1590 2310,1595.86 2310,1609.14 2304.14,1615 2285.86,1615 2280,1620.86 v1(2280,2500)
VCC_MOTOR: C14.2 C15.1 D5.1 Q1.3 U4.4 U4.5 U4.12
pads on no net: J1.4 J2. J2.P1 J2.P2 J2.P3 J2.P4 SW1.3 U1.2 U2.1 U3.8 U3.9 U3.10 U3.11 U3.12 U3.15 U3.16 U3.17 U3.18 U3.22 U3.23 U3.24 U3.25 U3.26 U3.28 U3.29 U3.30 U3.31 U3.32 U3.33 U3.34 U3.35 U3.36 U3.37 U5.1